# Altium PCB PCB1.PcbDoc (part 4 of 4)
Units mm, origin at the board's own origin, x right, y up, seen from the top; angles counter-clockwise.
Board outline 55.25 x 50.25 mm, 10 copper layers (Top Layer, GND L2, Layer 3, GND L4, PWR L5, PWR L6, GND L7, Layer 8, GND L9, Bottom Layer), stack 1.615 mm thick; 238 components, 362 nets, 1809 pads, 129 vias.
Unrouted connection lines stored in the file: 1070.
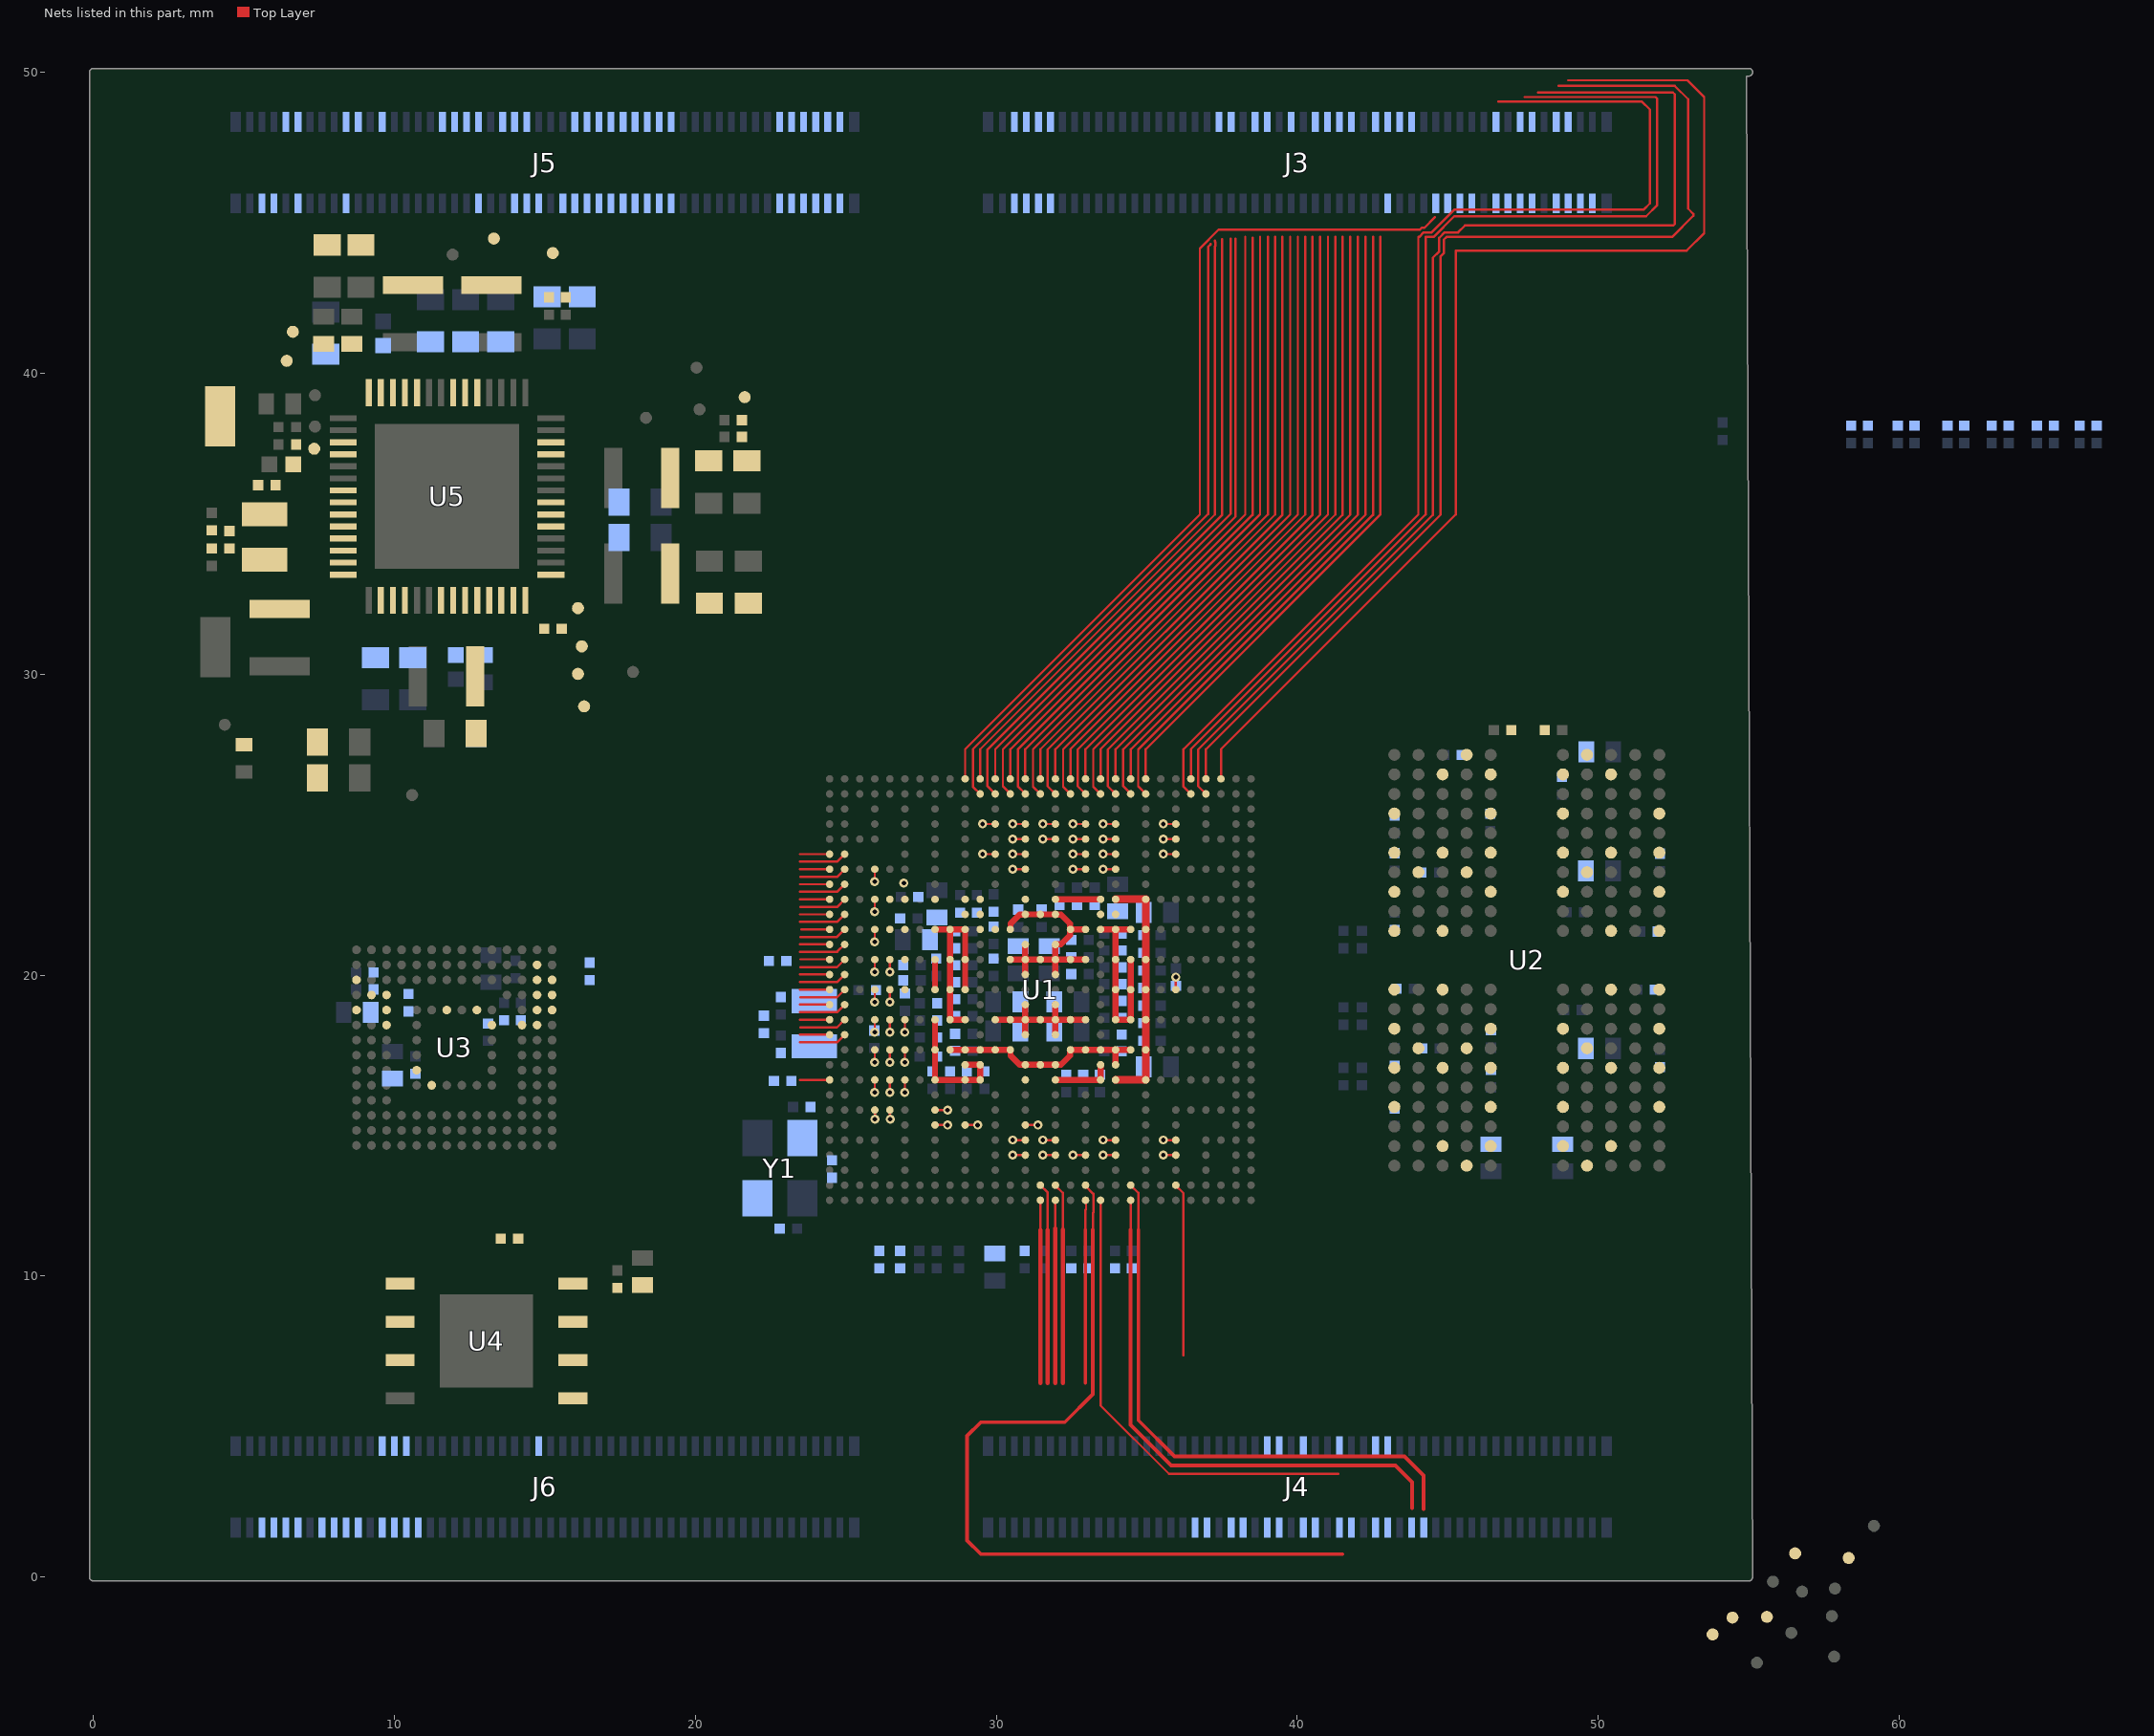
[diagram p3: the nets of this part, all layers, seen from the top]

## Via types
v1: diameter 0.3, hole 0.15, Top Layer to Bottom Layer, tented both sides, 129 vias

## Nets (pads, with @x,y where several pads share a name; then routed paths per layer and width w, separated by ;. In a path a pad name is that pad's centre, name@x,y a point inside that pad or via, vN(x,y) a via of type N, cw(c..) or ccw(c..) an arc to the next point about the centre after c; other vN are vias at no path point) (continued)
NVCC_DRAM_1V1: C51.2 C52.2 C53.2 C54.2 C55.2 C56.2 C57.2 C58.2 C59.2 C67.1 C68.1 C69.1 C70.1 C71.1 C72.1 C73.1 C74.1 C75.1 C76.1 C77.1 C78.1 C79.1 C80.1 C81.1 C82.1 C123.1 C124.2 L7.2 PTP32.1 R13.1 R15.1 U1.AA8 U1.AA10 U1.J8 U1.J10 U1.L8 U1.N8 U1.R8 U1.U8 U1.W8 U2.A4 U2.A9 U2.AA3 U2.AA5 U2.AA8 U2.AA10 U2.AB4 U2.AB9 U2.B3 U2.B5 U2.B8 U2.B10 U2.D1 U2.D5 U2.D8 U2.D12 U2.F3 U2.F5 U2.F8 U2.F10 U2.G2 U2.H1 U2.H5 U2.H8 U2.H12 U2.K1 U2.K3 U2.K10 U2.K12 U2.N1 U2.N3 U2.N10 U2.N12 U2.R1 U2.R5 U2.R8 U2.R12 U2.T2 U2.U3 U2.U5 U2.U8 U2.U10 U2.W1 U2.W5 U2.W8 U2.W12 U5.52 | length 8
  Top Layer w0.254: U1.J10@33.964,16.52 U1.J8@34.964,16.52 U1.L8@34.964,17.52 U1.N8@34.964,18.52 U1.R8@34.964,19.52 U1.U8@34.964,20.52 U1.W8@34.964,21.52 U1.AA8@34.964,22.52 U1.AA10@33.964,22.52
NVCC_SD2: C15.2 C115.2 PTP26.1 U1.W24 U5.55
NVCC_SNVS_1V8: C5.2 C103.1 PTP18.1 R1.1 R2.1 R3.1 R30.1 U1.R24 U5.3 | length 0
  Top Layer w0.076: U1.R24@26.964,19.52 U1.R24@26.972,19.512
ONOFF: J6.74 R3.2 U1.G22 | length 0.4
  Top Layer w0.076: U1.G22@27.964,15.52 v1@28.377,15.52
  other v1: 28.38,15.518
PCIE_CLK_N: J4.53 U1.E16 | length 0.4
  Top Layer w0.076: v1@30.551,14.52 U1.E16@30.964,14.52
  other v1: 30.548,14.523
PCIE_CLK_P: J4.55 U1.D16 | length 0.4
  Top Layer w0.076: v1@30.551,14.02 U1.D16@30.964,14.02
  other v1: 30.548,14.023
PCIE_RESREF: R19.2 U1.F16 | length 0.4
  Top Layer w0.076: U1.F16@30.964,15.02 v1@31.377,15.02
  other v1: 31.38,15.018
PCIE_RX_N: J4.59 U1.B14 | length 6.7
  Top Layer w0.076: U1.B14@31.956,13.02 32.213,12.763 32.213,11.545
  Top Layer w0.137: 32.213,6.452 32.213,11.545
PCIE_RX_P: J4.61 U1.A14 | length 6.1
  Top Layer w0.076: 31.963,11.585 31.964,11.586 U1.A14@31.964,12.52
  Top Layer w0.137: 31.963,6.452 31.963,11.585
PCIE_TX_N: J4.65 U1.B15 | length 6.7
  Top Layer w0.076: U1.B15@31.464,13.02 31.707,12.777 31.707,11.534
  Top Layer w0.137: 31.707,6.452 31.707,11.534
PCIE_TX_P: J4.67 U1.A15 | length 6.1
  Top Layer w0.076: 31.464,11.534 U1.A15@31.464,12.52
  Top Layer w0.137: 31.464,6.452 31.464,11.534
PMIC_32K_OUT: J5.41 U5.7
PMIC_nINT: U1.D6 U5.13 | length 0.4
  Top Layer w0.076: v1@35.551,14.02 U1.D6@35.964,14.02 U1.D6@35.928,14.02
  other v1: 35.548,14.023
PMIC_ON_REQ: J6.78 R1.2 U1.F22 U5.39 | length 0.4
  Top Layer w0.076: U1.F22@27.964,15.02 v1@28.377,15.02
  other v1: 28.38,15.018
PMIC_SCLH: J5.51 U5.25
PMIC_SCLL: J5.45 U5.27
PMIC_SDAH: J5.53 U5.24
PMIC_SDAL: J5.47 U5.26
PMIC_STBY_REQ: U1.J24 U5.40 | length 0.4
  Top Layer w0.076: v1@26.964,16.107 U1.J24@26.964,16.52
  other v1: 26.961,16.105
POR_B: J6.76 R2.2 U1.J29 U5.9 | length 1
  Top Layer w0.076: 23.478,16.52 U1.J29@24.464,16.52
QSPIA_DATA0: U1.R25 U4.5 | length 0.4
  Top Layer w0.076: v1@26.464,19.107 U1.R25@26.464,19.52
  other v1: 26.461,19.105
QSPIA_DATA1: U1.L25 U4.2 | length 0.4
  Top Layer w0.076: v1@26.464,17.107 U1.L25@26.464,17.52
  other v1: 26.461,17.105
QSPIA_DATA2: U1.L24 U4.3 | length 0.4
  Top Layer w0.076: v1@26.964,17.107 U1.L24@26.964,17.52
  other v1: 26.961,17.105
QSPIA_DATA3: U1.N24 U4.7 | length 0.4
  Top Layer w0.076: v1@26.964,18.107 U1.N24@26.964,18.52
  other v1: 26.961,18.105
QSPIA_DQS: C98.2 R24.1 U1.R26 | length 0.4
  Top Layer w0.076: v1@25.964,19.107 U1.R26@25.964,19.52
  other v1: 25.961,19.105
QSPIA_nSS0: R25.1 U1.L26 U4.1 | length 0.4
  Top Layer w0.076: v1@25.964,17.107 U1.L26@25.964,17.52
  other v1: 25.961,17.105
QSPIA_SCLK: U1.N25 U4.6 | length 0.4
  Top Layer w0.076: v1@26.464,18.107 U1.N25@26.464,18.52
  other v1: 26.461,18.105
SAI1_MCLK: J5.97 U1.AE12 | length 0.4
  Top Layer w0.076: v1@32.551,24.52 U1.AE12@32.964,24.52
  other v1: 32.548,24.523
SAI1_RXC: J3.34 U1.AH8 | length 21.8
  Top Layer w0.076: U1.AH8@34.972,26.02 34.715,26.278 34.715,27.496 42.514,35.294 42.514,44.526
SAI1_RXD0: J5.82 U1.AC10 | length 0.4
  Top Layer w0.076: v1@33.551,23.52 U1.AC10@33.964,23.52
  other v1: 33.548,23.523
SAI1_RXD1: J5.84 U1.AF10 | length 0.4
  Top Layer w0.076: v1@33.551,25.02 U1.AF10@33.964,25.02
  other v1: 33.548,25.023
SAI1_RXD2: J3.38 U1.AH9 | length 21.8
  Top Layer w0.076: U1.AH9@34.472,26.02 34.218,26.274 34.218,27.505 42.017,35.304 42.017,44.526
SAI1_RXD3: J3.32 U1.AJ8 | length 21.2
  Top Layer w0.076: U1.AJ8@34.964,26.52 34.964,27.508 42.763,35.307 42.763,44.526
SAI1_RXD4: J5.92 U1.AD10 | length 0.4
  Top Layer w0.076: v1@33.551,24.02 U1.AD10@33.964,24.02
  other v1: 33.548,24.023
SAI1_RXD5: J5.94 U1.AE10 | length 0.4
  Top Layer w0.076: v1@33.551,24.52 U1.AE10@33.964,24.52
  other v1: 33.548,24.523
SAI1_RXD6: J3.44 U1.AH10 | length 21.8
  Top Layer w0.076: U1.AH10@33.964,26.02 33.707,26.278 33.707,27.496 41.506,35.294 41.506,44.526
SAI1_RXD7: J3.56 U1.AH12 | length 21.8
  Top Layer w0.076: U1.AH12@32.964,26.02 32.707,26.278 32.707,27.496 40.506,35.294 40.506,44.526
SAI1_RXFS: J3.36 U1.AJ9 | length 21.2
  Top Layer w0.076: U1.AJ9@34.472,26.52 34.472,27.507 42.271,35.306 42.271,44.526
SAI1_TXC: J3.52 U1.AJ12 | length 21.2
  Top Layer w0.076: U1.AJ12@32.964,26.52 32.964,27.507 40.763,35.306 40.763,44.526
SAI1_TXD0: J3.46 U1.AJ11 | length 21.2
  Top Layer w0.076: U1.AJ11@33.464,26.52 33.464,27.507 41.263,35.306 41.263,44.526
SAI1_TXD1: J3.42 U1.AJ10 | length 21.2
  Top Layer w0.076: U1.AJ10@33.964,26.52 33.964,27.507 41.763,35.306 41.763,44.526
SAI1_TXD2: J3.48 U1.AH11 | length 21.8
  Top Layer w0.076: U1.AH11@33.464,26.02 33.221,26.264 33.221,27.507 41.02,35.306 41.02,44.526
SAI1_TXD3: J5.83 U1.AD12 | length 0.4
  Top Layer w0.076: v1@32.551,24.02 U1.AD12@32.964,24.02
  other v1: 32.548,24.023
SAI1_TXD4: J3.62 U1.AH13 | length 21.8
  Top Layer w0.076: U1.AH13@32.464,26.02 32.221,26.264 32.221,27.507 40.02,35.306 40.02,44.526
SAI1_TXD5: J3.1 U1.AH14 | length 21.8
  Top Layer w0.076: U1.AH14@31.964,26.02 31.707,26.278 31.707,27.496 39.506,35.294 39.506,44.526
SAI1_TXD6: J5.91 U1.AC12 | length 0.4
  Top Layer w0.076: v1@32.551,23.52 U1.AC12@32.964,23.52
  other v1: 32.548,23.523
SAI1_TXD7: J3.58 U1.AJ13 | length 21.2
  Top Layer w0.076: U1.AJ13@32.464,26.52 32.464,27.507 40.263,35.306 40.263,44.526
SAI1_TXFS: J5.95 U1.AF12 | length 0.4
  Top Layer w0.076: v1@32.551,25.02 U1.AF12@32.964,25.02
  other v1: 32.548,25.023
SAI2_MCLK: J3.3 U1.AJ15 | length 21.2
  Top Layer w0.076: U1.AJ15@31.464,26.52 31.464,27.507 39.263,35.306 39.263,44.526
SAI2_RXC: J3.7 U1.AJ16 | length 21.2
  Top Layer w0.076: U1.AJ16@30.964,26.52 30.964,27.508 38.763,35.307 38.763,44.526
SAI2_RXD: J3.64 U1.AJ14 | length 21.2
  Top Layer w0.076: U1.AJ14@31.964,26.52 31.964,27.507 39.763,35.306 39.763,44.526
SAI2_RXFS: J3.15 U1.AH17 | length 21.8
  Top Layer w0.076: U1.AH17@30.472,26.02 30.218,26.274 30.218,27.505 37.952,35.239 37.952,44.475
SAI2_TXC: J3.5 U1.AH15 | length 21.8
  Top Layer w0.076: U1.AH15@31.464,26.02 31.221,26.264 31.221,27.507 39.02,35.306 39.02,44.526
SAI2_TXD: J3.11 U1.AH16 | length 21.8
  Top Layer w0.076: U1.AH16@30.972,26.02 30.715,26.278 30.715,27.496 38.514,35.294 38.514,44.496
SAI2_TXFS: J3.13 U1.AJ17 | length 21.2
  Top Layer w0.076: U1.AJ17@30.472,26.52 30.472,27.507 38.271,35.306 38.271,44.526
SAI3_MCLK: J3.27 U1.AJ20 | length 29.1
  Top Layer w0.076: U1.AJ20@28.964,26.52 28.964,27.507 36.763,35.306 36.763,44.146 37.385,44.767 44.073,44.767 44.137,44.831 44.221,44.831 44.577,45.187
SAI3_RXC: J3.17 U1.AJ18 | length 21.2
  Top Layer w0.076: U1.AJ18@29.964,26.52 29.964,27.507 37.785,35.327 37.785,44.475
SAI3_RXD: J5.55 U1.AF18 | length 0.4
  Top Layer w0.076: v1@29.551,25.02 U1.AF18@29.964,25.02
  other v1: 29.548,25.023
SAI3_RXFS: J3.23 U1.AJ19 | length 21.1
  Top Layer w0.076: U1.AJ19@29.464,26.52 29.464,27.507 37.263,35.306 37.263,44.214 37.275,44.227 37.275,44.353 37.263,44.366 37.263,44.399
SAI3_TXC: J3.25 U1.AH19 | length 21.6
  Top Layer w0.076: U1.AH19@29.464,26.02 29.221,26.264 29.221,27.507 37.039,35.325 37.039,44.207 37.123,44.29
SAI3_TXD: J3.21 U1.AH18 | length 21.8
  Top Layer w0.076: U1.AH18@29.964,26.02 29.707,26.278 29.707,27.496 37.506,35.294 37.506,44.45
SAI3_TXFS: J5.61 U1.AC16 | length 0.4
  Top Layer w0.076: v1@30.551,23.52 U1.AC16@30.964,23.52
  other v1: 30.548,23.523
SAI5_MCLK: J5.58 U1.AF14 | length 0.4
  Top Layer w0.076: v1@31.551,25.02 U1.AF14@31.964,25.02
  other v1: 31.548,25.023
SAI5_RXD0: J6.52 U1.AE16 | length 0.4
  Top Layer w0.076: v1@30.551,24.52 U1.AE16@30.964,24.52
  other v1: 30.548,24.523
SAI5_RXD1: J5.66 U1.AD16 | length 0.4
  Top Layer w0.076: v1@30.551,24.02 U1.AD16@30.964,24.02
  other v1: 30.548,24.023
SAI5_RXD2: J5.62 U1.AF16 | length 0.4
  Top Layer w0.076: v1@30.551,25.02 U1.AF16@30.964,25.02
  other v1: 30.548,25.023
SAI5_RXD3: J5.68 U1.AE14 | length 0.4
  Top Layer w0.076: v1@31.551,24.52 U1.AE14@31.964,24.52
  other v1: 31.548,24.523
SD1_CLK: J6.75 U1.W28 | length 1.6
  Top Layer w0.076: 23.489,21.271 24.707,21.271 U1.W28@24.964,21.528
SD1_CMD: J6.77 U1.W29 | length 0.9
  Top Layer w0.076: 23.53,21.52 U1.W29@24.464,21.52
SD1_DATA0: J6.81 U1.Y29 | length 1
  Top Layer w0.076: 23.478,22.02 U1.Y29@24.464,22.02
SD1_DATA1: J6.83 U1.Y28 | length 1.6
  Top Layer w0.076: 23.478,21.777 24.721,21.777 U1.Y28@24.964,22.02
SD1_DATA2: J6.85 U1.V29 | length 1
  Top Layer w0.076: 23.478,21.028 U1.V29@24.464,21.028
SD1_DATA3: J6.87 U1.V28 | length 1.6
  Top Layer w0.076: 23.475,20.778 24.714,20.778 U1.V28@24.964,21.028
SD1_DATA4: J6.91 U1.U26 | length 0.4
  Top Layer w0.076: v1@25.964,20.107 U1.U26@25.964,20.52
  other v1: 25.961,20.105
SD1_DATA5: J6.93 U1.AA29 | length 1
  Top Layer w0.076: 23.478,22.52 U1.AA29@24.464,22.52
SD1_DATA6: J6.95 U1.AA28 | length 1.6
  Top Layer w0.076: 23.489,22.263 24.707,22.263 U1.AA28@24.964,22.52
SD1_DATA7: J6.97 U1.U25 | length 0.4
  Top Layer w0.076: v1@26.464,20.107 U1.U25@26.464,20.52
  other v1: 26.461,20.105
SD1_RESET_B: J6.73 U1.W25
SD1_STROBE: J6.71 U1.W26 | length 0.4
  Top Layer w0.076: v1@25.964,21.107 U1.W26@25.964,21.52
  other v1: 25.961,21.105
SD2_CLK: J3.96 U1.AB29 | length 1
  Top Layer w0.076: 23.478,23.02 U1.AB29@24.464,23.02
SD2_CMD: J3.98 U1.AB28 | length 1.6
  Top Layer w0.076: 23.478,22.777 24.721,22.777 U1.AB28@24.964,23.02
SD2_DATA0: J3.91 U1.AC28 | length 1.6
  Top Layer w0.076: 23.489,23.263 24.707,23.263 U1.AC28@24.964,23.52
SD2_DATA1: J3.93 U1.AC29 | length 1
  Top Layer w0.076: 23.478,23.52 U1.AC29@24.464,23.52
SD2_DATA2: J3.95 U1.AA26 | length 0.4
  Top Layer w0.076: v1@25.964,22.107 U1.AA26@25.964,22.52
  other v1: 25.961,22.105
SD2_DATA3: J3.97 U1.AA25
SD2_nCD: J3.94 U1.AD29 | length 1
  Top Layer w0.076: 23.478,24.02 U1.AD29@24.464,24.02
SD2_RESET_B: J3.35 U1.AD28 U5.12 | length 1.6
  Top Layer w0.076: 23.478,23.777 24.721,23.777 U1.AD28@24.964,24.02
SD2_VSEL: U1.E6 U5.29 | length 0.4
  Top Layer w0.076: v1@35.551,14.52 U1.E6@35.964,14.52 U1.E6@35.99,14.52
  other v1: 35.548,14.523
SD2_WP: J3.92 U1.AC26 | length 0.4
  Top Layer w0.076: v1@25.964,23.107 U1.AC26@25.964,23.52
  other v1: 25.961,23.105
SD3_CLK: U1.U28 U3.M6 | length 1.6
  Top Layer w0.076: 23.489,20.263 24.707,20.263 U1.U28@24.964,20.52
SD3_CMD: R23.1 U1.U29 U3.M5 | length 1
  Top Layer w0.076: 23.486,20.527 U1.U29@24.472,20.527
SD3_DATA0: R22.1 U1.P29 U3.A3 | length 1
  Top Layer w0.076: 23.478,19.02 U1.P29@24.464,19.02
SD3_DATA1: U1.N29 U3.A4 | length 1
  Top Layer w0.076: 23.478,18.52 U1.N29@24.464,18.52
SD3_DATA2: U1.M29 U3.A5 | length 1
  Top Layer w0.076: 23.478,18.02 U1.M29@24.464,18.02
SD3_DATA3: U1.R29 U3.B2 | length 1
  Top Layer w0.076: 23.478,19.52 U1.R29@24.464,19.52
SD3_DATA4: U1.R28 U3.B3 | length 1.6
  Top Layer w0.076: 23.489,19.263 24.707,19.263 U1.R28@24.964,19.52
SD3_DATA5: U1.P28 U3.B4 | length 1.6
  Top Layer w0.076: 23.478,18.777 24.721,18.777 U1.P28@24.964,19.02
SD3_DATA6: U1.N28 U3.B5 | length 1.6
  Top Layer w0.076: 23.489,18.263 24.707,18.263 U1.N28@24.964,18.52
SD3_DATA7: U1.M28 U3.B6 | length 1.6
  Top Layer w0.076: 23.478,17.777 24.721,17.777 U1.M28@24.964,18.02
SD3_STROBE: PTP15.1 U1.T29 U3.H5 | length 1
  Top Layer w0.076: 23.478,20.02 U1.T29@24.464,20.02
SPDIF_RX: J5.78 U1.AD18 | length 0.4
  Top Layer w0.076: v1@29.551,24.02 U1.AD18@29.964,24.02
  other v1: 29.548,24.023
SYS_nRST: J5.43 R30.2 U5.8
SYS_STATUS: U1.T28 | length 1.6
  Top Layer w0.076: 23.478,19.777 24.721,19.777 U1.T28@24.964,20.02
UART1_RXD: J5.54 U1.AD6 | length 0.4
  Top Layer w0.076: v1@35.551,24.02 U1.AD6@35.964,24.02
  other v1: 35.548,24.023
UART1_TXD: J3.6 U1.AJ3 | length 38.5
  Top Layer w0.076: U1.AJ3@37.464,26.52 37.464,27.507 45.263,35.306 45.263,44.069 52.934,44.069 53.518,44.653 53.518,49.174 52.961,49.731 48.999,49.731
UART2_RXD: J5.64 U1.AF6 | length 0.4
  Top Layer w0.076: v1@35.551,25.02 U1.AF6@35.964,25.02
  other v1: 35.548,25.023
UART2_TXD: J3.12 U1.AH4 | length 38.8
  Top Layer w0.076: U1.AH4@36.964,26.02 36.707,26.278 36.707,27.496 44.506,35.294 44.506,43.842 44.715,44.051 44.715,44.5 44.893,44.679 45.342,44.679 45.571,44.907 52.494,44.907 52.539,44.952 52.539,49.267 52.478,49.328 47.999,49.328
UART3_RXD: J5.56 U1.AE6 | length 0.4
  Top Layer w0.076: v1@35.551,24.52 U1.AE6@35.964,24.52
  other v1: 35.548,24.523
UART3_TXD: J3.8 U1.AJ4 | length 38.2
  Top Layer w0.076: U1.AJ4@36.964,26.52 36.964,27.507 44.763,35.306 44.763,43.884 44.867,43.988 44.867,44.437 44.956,44.526 52.451,44.526 53.156,45.231 53.156,45.294 52.984,45.466 52.984,49.104 52.542,49.547 48.678,49.547
UART4_RXD: J3.14 U1.AJ5 | length 37.3
  Top Layer w0.076: U1.AJ5@36.464,26.52 36.464,27.507 44.263,35.306 44.263,44.526 44.525,44.526 45.211,45.212 51.587,45.212 51.958,45.582 51.958,49.119 51.901,49.175 47.553,49.175
UART4_TXD: J3.18 U1.AH5 | length 38.3
  Top Layer w0.076: U1.AH5@36.464,26.02 36.221,26.264 36.221,27.507 44.02,35.306 44.02,44.526 44.047,44.526 44.2,44.679 44.462,44.679 45.224,45.441 51.511,45.441 51.714,45.644 51.714,48.759 51.45,49.023 46.674,49.023
USB1_D_N: J4.36 U1.E10 | length 0.4
  Top Layer w0.076: v1@33.551,14.52 U1.E10@33.964,14.52
  other v1: 33.548,14.523
USB1_D_P: J4.38 U1.D10 | length 0.4
  Top Layer w0.076: v1@33.551,14.02 U1.D10@33.964,14.02
  other v1: 33.548,14.023
USB1_RX_N: J4.29 U1.B9 | length 19.3
  Top Layer w0.076: U1.B9@34.464,13.02 34.721,12.763 34.721,11.545
  Top Layer w0.121: 34.721,11.545 34.721,5.208 35.916,4.013 43.561,4.013 44.196,3.378 44.196,2.261
USB1_RX_P: J4.31 U1.A9 | length 18.5
  Top Layer w0.076: 34.464,11.534 U1.A9@34.464,12.52
  Top Layer w0.121: 34.464,11.534 34.464,5.058 35.814,3.708 43.256,3.708 43.815,3.15 43.815,2.286
USB1_TX_N: C143.2 J4.35
USB1_TX_P: C83.1 J4.37
USB1_VBUS_3V3: J4.44 U1.A11 | length 15.7
  Top Layer w0.076: U1.A11@33.464,12.52 33.464,5.703 35.738,3.429 41.357,3.429
USB2_D_N: J4.54 U1.E14 | length 0.4
  Top Layer w0.076: v1@31.551,14.52 U1.E14@31.964,14.52
  other v1: 31.548,14.523
USB2_D_P: J4.56 U1.D14 | length 0.4
  Top Layer w0.076: v1@31.551,14.02 U1.D14@31.964,14.02
  other v1: 31.548,14.023
USB2_RX_N: J4.41 U1.B12 | length 27.9
  Top Layer w0.076: U1.B12@32.964,13.02 32.964,12.993 33.225,12.732 33.225,12.115 33.207,12.097 33.207,11.534
  Top Layer w0.121: 33.207,11.534 33.207,6.08 32.275,5.147 29.488,5.147 29.032,4.691 29.032,1.219 29.489,0.762 41.504,0.762
USB2_RX_P: J4.43 U1.A12 | length 6.1
  Top Layer w0.076: 32.959,11.534 32.964,11.539 32.964,12.198 32.982,12.216 32.982,12.503 U1.A12@32.964,12.52
  Top Layer w0.121: 32.959,6.452 32.959,11.534
USB2_TX_N: C84.2 J4.47
USB2_TX_P: C85.2 J4.49
USB2_VBUS_3V3: J4.50 U1.D12 | length 0.4
  Top Layer w0.076: v1@32.551,14.02 U1.D12@32.964,14.02
  other v1: 32.548,14.023
VDD_1V8: C21.2 C61.1 C62.1 C63.1 C64.1 C65.1 C66.1 C91.1 C92.2 C93.2 C94.2 C95.2 C99.1 C100.1 C120.2 C121.1 C132.2 C133.2 C134.2 C135.2 C136.2 C137.2 J5.29 J5.31 J5.33 J5.35 J5.37 J5.39 L6.2 PTP30.1 R22.2 R23.2 R24.2 R25.2 R31.1 U1.AA16 U1.AA19 U1.AA24 U1.J16 U1.R22 U1.U22 U1.U24 U2.F1 U2.F12 U2.G4 U2.G9 U2.T4 U2.T9 U2.U1 U2.U12 U3.C6 U3.M4 U3.N4 U3.P3 U3.P5 U4.8 U5.14 | length 1
  Top Layer w0.203: U1.R22@27.964,19.52 U1.U22@27.964,20.52
  other v1: 26.929,23.06
VDD_3V3: C8.2 C9.2 C88.2 C89.2 C90.2 C116.1 C117.2 C128.2 C138.2 C139.2 C140.2 C141.2 C142.2 J5.30 J5.32 J5.34 J5.36 J5.38 J5.40 L5.2 PTP28.1 R33.2 R34.2 R35.2 R36.2 R37.2 R38.2 R39.2 R40.2 R41.2 R42.2 R43.2 R44.2 U1.AA11 U1.AA14 U1.J11 U1.J14 U1.K11 U1.Y10 U1.Y11 U3.E6 U3.F5 U3.J10 U3.K9 U5.21 U5.22 | length 3.5
  Top Layer w0.203: U1.J14@31.964,16.52 U1.J11@33.464,16.52 U1.K11@33.464,17.02 ; U1.AA14@31.964,22.52 U1.AA11@33.464,22.52
VDD_ARM: C10.2 C11.2 C12.2 C13.2 C14.2 C16.2 C17.2 C18.2 C19.2 C20.2 C102.1 C104.2 L2.2 PTP17.1 R26.2 R27.2 U1.T14 U1.T16 U1.U12 U1.U13 U1.U14 U1.U15 U1.U16 U1.U17 U1.V14 U1.V16 U1.W12 U1.W13 U1.W17 U1.Y14 U1.Y15 U1.Y16 | length 8.4
  Top Layer w0.203: U1.U17@30.464,20.52 U1.U16@30.964,20.52 ; U1.W17@30.464,21.52 30.473,21.529 30.473,21.709 30.775,22.011 30.955,22.011 U1.Y16@30.964,22.02 U1.Y15@31.464,22.02 U1.Y14@31.964,22.02 31.973,22.011 32.153,22.011 32.455,21.709 32.455,21.529 U1.W13@32.464,21.52 ; U1.T16@30.964,20.02 U1.U16@30.964,20.52 ; U1.V16@30.964,21.02 U1.U16@30.964,20.52 ; U1.T14@31.964,20.02 U1.U14@31.964,20.52 ; U1.U12@32.964,20.52 U1.U13@32.464,20.52 U1.U14@31.964,20.52 ; U1.W12@32.964,21.52 U1.W13@32.464,21.52 ; U1.U16@30.964,20.52 U1.U15@31.464,20.52 U1.U14@31.964,20.52 ; U1.U14@31.964,20.52 U1.V14@31.964,21.02 31.973,21.029 32.153,21.029 32.455,21.332 32.455,21.511 U1.W13@32.464,21.52
VDD_MIPI_1P2_CAP: C60.2 U1.F20 | length 0.4
  Top Layer w0.076: U1.F20@28.964,15.02 v1@29.377,15.02
  other v1: 29.38,15.018
VDD_SNVS_0V8: C6.2 U1.N26 | length 0.4
  Top Layer w0.076: v1@25.964,18.107 U1.N26@25.964,18.52
  other v1: 25.961,18.105
VDD_SOC: C22.2 C23.2 C24.2 C25.2 C26.2 C27.2 C28.2 C29.2 C35.2 C36.2 C37.2 C38.2 C43.2 C44.2 C45.2 C46.2 C47.2 C48.2 C49.2 C50.2 C107.1 C108.2 C111.1 C113.2 L3.2 L4.2 PTP21.1 R28.2 R29.2 U1.K10 U1.K14 U1.K15 U1.K16 U1.L9 U1.L10 U1.L11 U1.L12 U1.L13 U1.L17 U1.L18 U1.L19 U1.L20 U1.L21 U1.M14 U1.M16 U1.N9 U1.N10 U1.N12 U1.N13 U1.N14 U1.N15 U1.N16 U1.N17 U1.N18 U1.N20 U1.N21 U1.P14 U1.P16 U1.R9 U1.R10 U1.R20 U1.R21 U1.U9 U1.U10 U1.U20 U1.U21 U1.W9 U1.W10 U1.W11 U1.W20 U1.W21 U1.W22 | length 25.1
  Top Layer w0.203: U1.W22@27.964,21.52 U1.W21@28.464,21.52 ; U1.L21@28.464,17.52 U1.L20@28.964,17.52 U1.L19@29.464,17.52 U1.L18@29.964,17.52 U1.L17@30.464,17.52 30.473,17.511 30.473,17.332 30.775,17.029 30.955,17.029 U1.K16@30.964,17.02 U1.K15@31.464,17.02 U1.K14@31.964,17.02 31.973,17.029 32.153,17.029 32.455,17.332 32.455,17.511 U1.L13@32.464,17.52 U1.L12@32.964,17.52 U1.L11@33.464,17.52 U1.L10@33.964,17.52 ; U1.N20@28.964,18.52 U1.N21@28.464,18.52 U1.R21@28.464,19.52 U1.U21@28.464,20.52 U1.W21@28.464,21.52 ; U1.R20@28.964,19.52 U1.U20@28.964,20.52 U1.W20@28.964,21.52 U1.W21@28.464,21.52 ; U1.N18@29.964,18.52 U1.N17@30.464,18.52 U1.N16@30.964,18.52 U1.N15@31.464,18.52 U1.N14@31.964,18.52 ; U1.M16@30.964,18.02 U1.P16@30.964,19.02 ; U1.M14@31.964,18.02 U1.N14@31.964,18.52 ; U1.P14@31.964,19.02 U1.N14@31.964,18.52 ; U1.N12@32.964,18.52 U1.N13@32.464,18.52 U1.N14@31.964,18.52 ; U1.W11@33.464,21.52 U1.W10@33.964,21.52 ; U1.K10@33.964,17.02 U1.L10@33.964,17.52 ; U1.L9@34.464,17.52 U1.L10@33.964,17.52 ; U1.U9@34.464,20.52 U1.R9@34.464,19.52 U1.N9@34.464,18.52 U1.N10@33.964,18.52 U1.R10@33.964,19.52 U1.U10@33.964,20.52 U1.W10@33.964,21.52 ; U1.W9@34.464,21.52 U1.W10@33.964,21.52
VDDA_1V8: C7.2 C30.2 C31.2 C32.2 C33.2 C34.2 C39.2 C40.2 C41.2 C42.2 C110.1 PTP22.1 U1.AA20 U1.AA22 U1.J19 U1.J20 U1.J22 U1.K19 U1.K20 U1.L22 U1.N22 U1.R6 U1.W18 U1.W19 U1.Y19 U1.Y20 U5.54 | length 4.9
  Top Layer w0.076: U1.R6@35.964,19.52 v1@35.964,19.933
  Top Layer w0.203: U1.N22@27.964,18.52 U1.L22@27.964,17.52 U1.J22@27.964,16.52 U1.J20@28.964,16.52 U1.J19@29.464,16.52 U1.K19@29.464,17.02 U1.K20@28.964,17.02
  other v1: 35.967,19.936
VINT: C127.2 U5.4
VSD_3V3: C129.1 J5.42 J5.44 J5.46 PTP33.1 U5.23
VSYS_5V: C101.2 C105.2 C109.2 C114.2 C118.2 C119.2 C122.2 C125.2 C126.2 J1.1 J5.1 J5.2 J5.3 J5.4 J5.5 J5.6 J5.7 J5.8 J5.9 J5.10 J5.11 J5.12 L1.2 U5.16 U5.17 U5.18 U5.33 U5.34 U5.35 U5.47 U5.48 U5.49 U5.53 U5.56
WDOG_B: PTP34.1 R31.2 U1.B6 U5.28 | length 5.8
  Top Layer w0.076: U1.B6@35.956,13.02 36.216,12.76 36.216,7.372
XIN_32K: C130.1 QZ2.1 R32.1 U5.10
XOUT_32K: C131.1 QZ2.2 R32.2 U5.11
XTALI_24M: C3.1 PTP4.1 R7.1 U1.G25 Y1.1 | length 0.3
  Top Layer w0.076: U1.G25@26.464,15.52 26.469,15.515 26.469,15.221 v1(26.475,15.216)
XTALI_32K: C1.2 PTP2.1 QZ1.1 R6.1 U1.J25 | length 0.4
  Top Layer w0.076: v1@26.464,16.107 U1.J25@26.464,16.52
  other v1: 26.461,16.105
XTALO_24M: C4.1 PTP5.1 R7.2 U1.G26 Y1.3 | length 0.3
  Top Layer w0.076: U1.G26@25.964,15.52 25.965,15.519 25.965,15.217 v1(25.967,15.216)
XTALO_32K: C2.1 PTP3.1 QZ1.2 R6.2 U1.J26 | length 0.4
  Top Layer w0.076: v1@25.964,16.107 U1.J26@25.964,16.52
  other v1: 25.961,16.105
pads on no net: J3.76 J3.78 J3.S1 J3.S2 J3.S3 J3.S4 J4.1 J4.2 J4.3 J4.4 J4.5 J4.6 J4.42 J4.48 J4.S1 J4.S2 J4.S3 J4.S4 J5.48 J5.52 J5.63 J5.71 J5.72 J5.73 J5.74 J5.86 J5.87 J5.S1 J5.S2 J5.S3 J5.S4 J6.34 J6.36 J6.38 J6.42 J6.44 J6.48 J6.54 J6.56 J6.58 J6.62 J6.64 J6.66 J6.68 J6.72 J6.82 J6.S1 J6.S2 J6.S3 J6.S4 U1.AC4 U1.AC5 U1.B11 U1.E12 U1.F24 U1.G4 U1.J5 U1.L5 U1.N1 U1.N2 U1.P1 U1.R4 U1.R5 U1.T2 U1.U1 U1.U2 U1.W6 U2.A1 U2.A2 U2.A11 U2.A12 U2.AA1 U2.AA12 U2.AB1 U2.AB2 U2.AB11 U2.AB12 U2.B1 U2.B12 U2.G11 U2.K5 U2.K8 U2.N5 U2.N8 U3.A1 U3.A2 U3.A7 U3.A8 U3.A9 U3.A10 U3.A11 U3.A12 U3.A13 U3.A14 U3.B1 U3.B7 U3.B8 U3.B9 U3.B10 U3.B11 U3.B12 U3.B13 U3.B14 U3.C1 U3.C3 U3.C5 U3.C7 U3.C8 U3.C9 U3.C10 U3.C11 U3.C12 U3.C13 U3.C14 U3.D1 U3.D2 U3.D3 U3.D4 U3.D12 U3.D13 U3.D14 U3.E1 U3.E2 U3.E3 U3.E5 U3.E8 U3.E9 U3.E10 U3.E12 U3.E13 U3.E14 U3.F1 U3.F2 U3.F3 U3.F10 U3.F12 U3.F13 U3.F14 U3.G1 U3.G2 U3.G3 U3.G10 U3.G12 U3.G13 U3.G14 U3.H1 U3.H2 U3.H3 U3.H12 U3.H13 U3.H14 U3.J1 U3.J2 U3.J3 U3.J12 U3.J13 U3.J14 U3.K1 U3.K2 U3.K3 U3.K5 U3.K6 U3.K7 U3.K10 U3.K12 U3.K13 U3.K14 U3.L1 U3.L2 U3.L3 U3.L12 U3.L13 U3.L14 U3.M1 U3.M2 U3.M3 U3.M7 U3.M8 U3.M9 U3.M10 U3.M11 U3.M12 U3.M13 U3.M14 U3.N1 U3.N3 U3.N6 U3.N7 U3.N8 U3.N9 U3.N10 U3.N11 U3.N12 U3.N13 U3.N14 U3.P1 U3.P2 U3.P7 U3.P8 U3.P9 U3.P10 U3.P11 U3.P12 U3.P13 U3.P14 U5.6
copper on no net: | length 18.5
  Top Layer w0.076: 26.964,15.02 v1@27.377,15.02 ; v1@32.551,14.52 32.964,14.52 ; 33.464,13.02 33.721,12.763 33.721,11.545 33.721,7.874 33.721,6.452 ; 35.964,21.52 v1@35.964,21.933 ; 36.464,16.52 v1@36.464,16.933 ; 36.464,17.52 v1@36.464,17.933 ; 36.464,19.52 v1@36.464,19.933 ; 36.464,23.52 v1@36.464,23.933 ; 36.964,15.52 v1@36.964,15.933 ; 36.964,19.52 v1@36.964,19.933 ; 36.964,23.52 v1@36.964,23.933 ; 37.964,18.52 38.207,18.764 39.45,18.764 ; 37.964,20.012 38.221,20.27 39.439,20.27 ; 37.964,20.512 38.218,20.766 39.449,20.766 ; 38.464,18.52 39.45,18.52 ; 38.464,19.02 39.45,19.02 ; 38.464,20.512 39.45,20.512
  other v1: 32.548,14.523 27.38,15.018 36.967,15.936 36.467,16.936 36.467,17.936 36.467,19.936 36.967,19.936 35.967,21.936 36.467,23.936 36.967,23.936

## Polygon pours and split planes (outlines as drawn)
VDD_1V8 on Top Layer "VDD_1V8_L01_P000" (solid, remove dead copper, pour order 0): 29.272,22.841 31.253,22.841 31.253,22.308 31.202,22.257 29.272,22.257
NVCC_DRAM_1V1 on Top Layer "NVCC_DRAM_1V1_L01_P008" (solid, remove dead copper, pour order 8): 33.818,22.79 33.818,22.347 33.846,22.318 34.683,22.318 34.683,16.719 34.672,16.709 33.782,16.709 33.782,16.324 33.861,16.246 35.06,16.246 35.06,16.26 35.241,16.44 35.239,16.442 35.239,22.728 34.124,22.728 34.062,22.79
VDD_1V8 on Top Layer "VDD_1V8_L01_P007" (solid, remove dead copper, pour order 7): 27.798,20.911 28.154,20.911 28.179,20.885 28.179,19.387 27.773,19.387 27.798,19.412
VDD_3V3 on Top Layer "VDD_3V3_L01_P006" (solid, remove dead copper, pour order 6): 33.348,17.174 33.352,17.17 33.646,17.17 33.646,16.319 33.564,16.237 31.735,16.237 31.735,16.644 31.792,16.7 31.796,16.696 33.105,16.696 33.352,16.944 33.352,17.17
VDD_3V3 on Top Layer "VDD_3V3_L01_P005" (solid, remove dead copper, pour order 5): 31.761,22.765 33.59,22.765 33.59,22.297 33.655,22.232 34.326,22.232 34.326,21.876 34.275,21.825 34.236,21.864 33.068,21.864 32.574,22.359 32.561,22.346 31.766,22.346 31.766,22.76
VDDA_1V8 on Top Layer "VDDA_1V8_L01_P004" (solid, remove dead copper, pour order 4): 27.697,18.803 28.205,18.803 28.205,17.177 28.154,17.126 28.179,17.101 30.084,17.101 30.084,16.324 27.703,16.324 27.703,18.796
VDD_ARM on Top Layer "VDD_ARM_L01_P003" (solid, remove dead copper, pour order 3): 30.491,22.079 32.655,22.079 33.158,21.576 33.158,20.428 32.751,20.428 32.193,19.869 30.465,19.869 30.465,20.174 30.237,20.403 30.237,21.952 30.364,21.952
VDD_SOC on Top Layer "VDD_SOC_L01_P002" (solid, remove dead copper, pour order 2): 27.824,21.724 27.824,21.343 28.154,21.343 28.332,21.165 28.332,17.279 28.357,17.253 30.389,17.253 30.872,16.771 32.523,16.771 33.031,17.279 33.742,17.279 33.742,16.923 33.869,16.796 34.656,16.796 34.656,21.774 34.58,21.851 34.479,21.749 33.285,21.749 33.285,21.19 33.64,21.19 33.64,19.742 33.082,19.184 29.246,19.184 29.246,21.673 29.195,21.724
VDDA_1V8 on Top Layer "VDDA_1V8_L01_P001" (solid, remove dead copper, pour order 1): 27.773,22.714 27.773,22.181 28.51,22.181 28.687,22.003 28.687,21.825 29.094,21.825 29.221,21.698 29.221,21.317 30.135,21.317 30.237,21.419 30.237,21.952 29.881,21.952 29.576,22.257 29.227,22.257 28.964,22.52 28.967,22.523 28.967,22.74 27.798,22.74

## Keep-outs
Keep-Out Layer:
  lines w0.254: 0,0 55.018,0 54.813,50 0,50 0,0

## Text inside footprints (layer, text, board x,y; h text height)
J6: Bottom 3D Body "Note: Stencil is based on 0.12 mm metal mask thickness" at 25.8,-2.2 h0.41